# Altium PCB PDB_Rev2.PcbDoc (part 2 of 2)
Units mil, origin at the board's own origin, x right, y up, seen from the top; angles counter-clockwise.
Board outline 2952.76 x 3937.01 mil, 2 copper layers (Top Layer, Bottom Layer); 43 components, 21 nets, 155 pads, 33 vias.
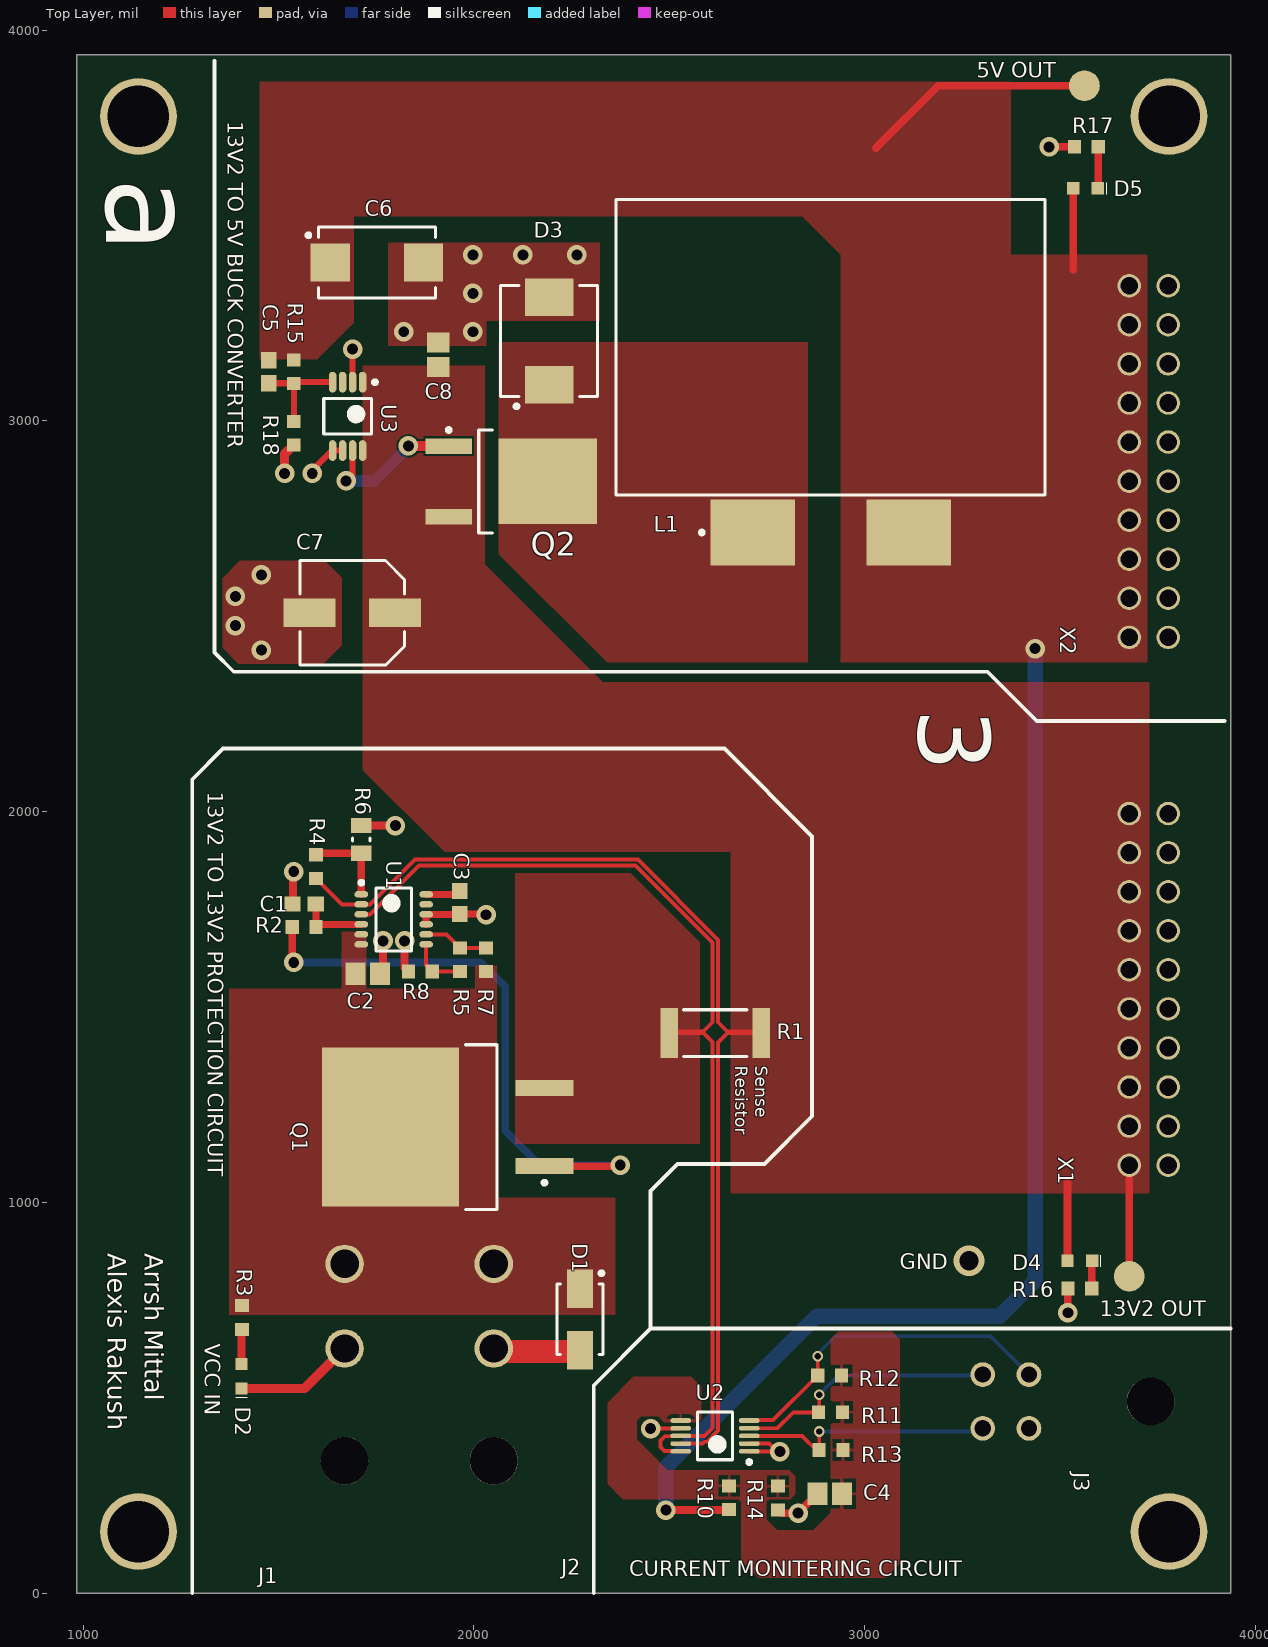
[diagram p0: Top Layer view]

## Part data (continued)
R13: library part 0603-10KR, "RES SMD 10K OHM 5% 1/10W 0603", Case/Package=0603, Case Code (Metric)=1608, Manufacturer=Yageo, Manufacturer Part Number=RC0603JR-0710KL, Max Operating Temperature=155°C, Max Power Dissipation=100mW, Min Operating Temperature=-55°C, Resistance=10kR, Supplier Part Number 1=311-10KGRDKR-ND, Temperature Coefficient=100ppm/°C, Tolerance=5%, Voltage Rating=50V, Case Code (Imperial)=0603, ComponentLink1Description=http://www.yageo.com/documents/recent/PYu-RC_Group_51_RoHS_L_10.pdf?src-supplier=Digi-Key, ComponentLink1URL=http://www.yageo.com/documents/recent/PYu-RC_Group_51_RoHS_L_10.pdf?src-supplier=Digi-Key, Composition="Thick Film", Contact Plating=Tin,Matte, Depth=0.8mm, Features="Moisture Resistant", Height - Seated (Max)=0.022inch, Lead Free="Lead Free", Length=0.063inch, Military Standard=Not, Number of Pins=2, Number of Terminations=2, Packaging="Tape and Reel", Power Rating=100mW, Pricing 1="1=0.1, 10=0.019, 100=0.0077, 1000=0.00347, 2500=0.00301 (USD)", Radiation Hardening=No, REACH SVHC=Unknown, Stock 1=3006558, Supplier 1=Digi-Key, Termination=SMD/SMT, Voltage Rating (DC)=50V, Width=0.031inch
R14: library part 0603-6.65KR, "RES SMD 6.65K OHM 0.1% 1/6W 0603", Case/Package=0603, Case Code (Metric)=1608, Manufacturer="TE Connectivity", Manufacturer Part Number=8-2176088-4, Max Operating Temperature=155°C, Max Power Dissipation=167mW, Min Operating Temperature=-55°C, Package Quantity=1000, Power Rating=166mW, Resistance=6.65kR, Resistor Type="Thin Film", Supplier Part Number 1=A110187DKR-ND, Temperature Coefficient=25ppm/°C, Tolerance=0.1%, Voltage Rating=100V, Case Code (Imperial)=0603, ComponentLink1Description=http://www.te.com/commerce/DocumentDelivery/DDEController?Action=srchrtrv&DocNm=1773272&DocType=DS&DocLang=English&src-supplier=Digi-Key, ComponentLink1URL=http://www.te.com/commerce/DocumentDelivery/DDEController?Action=srchrtrv&DocNm=1773272&DocType=DS&DocLang=English&src-supplier=Digi-Key, Height=0.022inch, Length=0.061inch, Mount="Surface Mount", Number of Terminations=2, Packaging="Tape and Reel", Pricing 1="1=0.69, 10=0.494, 100=0.2568 (USD)", Stock 1=400, Supplier 1=Digi-Key, Termination=Solder, Width=0.031inch
R15: library part 0603-24KR, "Res Thick Film 0603 24K Ohm 1% 0.1W(1/10W) ±100ppm/C Molded SMD Automotive Paper T/R", Case/Package=0603, Case Code (Metric)=1608, Manufacturer=Vishay, Manufacturer Part Number=CRCW060324K0FKEA, Max Operating Temperature=155°C, Max Power Dissipation=100mW, Min Operating Temperature=-55°C, Package Quantity=10, Resistance=24kR, Resistance Tolerance=1%, Resistor Type="Thick Film", Supplier Part Number 1=541-24.0KHCT-ND, Temperature Coefficient=100ppm/°C, Voltage Rating=75V, Case Code (Imperial)=0603, ComponentLink1Description=https://www.distrelec.biz/Web/Downloads/a_/en/flD-CRCW-e3_data_en.pdf?mime=application%2Fpdf&src-supplier=Distrelec, ComponentLink1URL=https://www.distrelec.biz/Web/Downloads/a_/en/flD-CRCW-e3_data_en.pdf?mime=application%2Fpdf&src-supplier=Distrelec, ComponentLink2Description=http://www.farnell.com/datasheets/2045673.pdf?src-supplier=Element14, ComponentLink2URL=http://www.farnell.com/datasheets/2045673.pdf?src-supplier=Element14, ComponentLink3Description=http://www.vishay.com/docs/20035/dcrcwe3.pdf?src-supplier=Digi-Key, ComponentLink3URL=http://www.vishay.com/docs/20035/dcrcwe3.pdf?src-supplier=Digi-Key, ComponentLink4Description=http://uk.rs-online.com/webdocs/0d98/0900766b80d98afc.pdf?src-supplier=RSComponents, ComponentLink4URL=http://uk.rs-online.com/webdocs/0d98/0900766b80d98afc.pdf?src-supplier=RSComponents, ComponentLink5Description=https://www.alliedelec.com/m/d/0c934d6939ccefa68dbe0b96d821c8cf.pdf?src-supplier=Allied+Electronics, ComponentLink5URL=https://www.alliedelec.com/m/d/0c934d6939ccefa68dbe0b96d821c8cf.pdf?src-supplier=Allied+Electronics, ComponentLink6Description=http://www.mouser.com/ds/2/427/dcrcwe3-109170.pdf?src-supplier=Mouser, ComponentLink6URL=http://www.mouser.com/ds/2/427/dcrcwe3-109170.pdf?src-supplier=Mouser, ComponentLink7Description=http://www.vishay.com/docs/20035/dcrcwe3.pdf?src-supplier=Future+Electronics, ComponentLink7URL=http://www.vishay.com/docs/20035/dcrcwe3.pdf?src-supplier=Future+Electronics, ComponentLink8Description=http://www.vishay.com/docs/20035/dcrcwe3.pdf?src-supplier=Avnet+Europe, ComponentLink8URL=http://www.vishay.com/docs/20035/dcrcwe3.pdf?src-supplier=Avnet+Europe, ComponentLink9Description=http://www.vishay.com/docs/20035/dcrcwe3.pdf?src-supplier=Avnet, ComponentLink9URL=http://www.vishay.com/docs/20035/dcrcwe3.pdf?src-supplier=Avnet, Construction=Rectangular, Contact Plating=Tin, Depth=0.85mm, Features="Automotive AEC-Q200", Height=0.45mm, Lead Free="Lead Free", Length=1.55mm, Military Standard=Not, Mount="Surface Mount", Number of Terminations=2, Packaging="Tape and Reel", Power Rating=100mW, Pricing 1="1=0.1, 10=0.036, 100=0.0145, 1000=0.00652, 2500=0.00566 (USD)", Radiation Hardening=No, REACH SVHC=Unknown, RoHS Compliant=Yes, Series=CRCW, Stock 1=989, Supplier 1=Digi-Key, Technology="THICK FILM", Termination=SMD/SMT, Tolerance=1%, Voltage Rating (DC)=75V, Weight=7.1E-05oz, Width=0.033inch, Working Voltage=75V
R16: library part 0603-665R, "RES SMD 665 OHM 1% 1/10W 0603", Case/Package=0603, Case Code (Metric)=1608, Manufacturer=Yageo, Manufacturer Part Number=RC0603FR-07665RL, Max Operating Temperature=155°C, Max Power Dissipation=100mW, Min Operating Temperature=-55°C, Package Quantity=1, Supplier Part Number 1=311-665HRDKR-ND, Temperature Coefficient=100ppm/°C, Tolerance=1%, Voltage Rating=75V, Voltage Rating (DC)=50V, Case Code (Imperial)=0603, ComponentLink1Description=http://www.yageo.com/documents/recent/PYu-RC_Group_51_RoHS_L_9.pdf?src-supplier=Digi-Key, ComponentLink1URL=http://www.yageo.com/documents/recent/PYu-RC_Group_51_RoHS_L_9.pdf?src-supplier=Digi-Key, ComponentLink2Description=http://www.yageo.com/documents/recent/PYu-RC0603_51_RoHS_L_4.pdf?src-supplier=Avnet, ComponentLink2URL=http://www.yageo.com/documents/recent/PYu-RC0603_51_RoHS_L_4.pdf?src-supplier=Avnet, ComponentLink3Description=http://www.yageo.com/documents/recent/PYu-RC_Group_51_RoHS_L_10.pdf?src-supplier=Digi-Key, ComponentLink3URL=http://www.yageo.com/documents/recent/PYu-RC_Group_51_RoHS_L_10.pdf?src-supplier=Digi-Key, ComponentLink4Description=http://www.yageo.com/documents/recent/PYu-RC0603_51_RoHS_L_4.pdf?src-supplier=Avnet+Europe, ComponentLink4URL=http://www.yageo.com/documents/recent/PYu-RC0603_51_RoHS_L_4.pdf?src-supplier=Avnet+Europe, Composition="Thick Film", Contact Plating=Tin,Matte, Depth=0.8mm, Features="Moisture Resistant", Height=0.022inch, Lead Free="Lead Free", Length=1.6mm, Military Standard=Not, Number of Terminations=2, Packaging="Tape and Reel", Power Rating=100mW, Pricing 1="1=0.1, 10=0.023, 100=0.0094, 1000=0.00421, 2500=0.00366 (USD)", Resistance=665R, Stock 1=143871, Supplier 1=Digi-Key, Termination=SMD/SMT, Weight=7.1E-05oz, Width=0.8mm
R17: library part 0603-180R, "RES SMD 180 OHM 1% 1/10W 0603", Case/Package=0603, Case Code (Metric)=1608, Manufacturer="TE Connectivity", Manufacturer Part Number=CRGCQ0603F180R, Max Operating Temperature=155°C, Max Power Dissipation=100mW, Min Operating Temperature=-55°C, Supplier Part Number 1=A129679DKR-ND, Temperature Coefficient=100ppm/°C, Tolerance=1%, Case Code (Imperial)=0603, ComponentLink1Description=https://www.te.com/commerce/DocumentDelivery/DDEController?Action=srchrtrv&DocNm=1773204-3&DocType=DS&DocLang=English&src-supplier=Digi-Key, ComponentLink1URL=https://www.te.com/commerce/DocumentDelivery/DDEController?Action=srchrtrv&DocNm=1773204-3&DocType=DS&DocLang=English&src-supplier=Digi-Key, ComponentLink2Description=https://www.te.com/commerce/DocumentDelivery/DDEController?Action=srchrtrv&amp;DocNm=1773204-3&amp;DocType=DS&amp;DocLang=English&src-supplier=Digi-Key, ComponentLink2URL=https://www.te.com/commerce/DocumentDelivery/DDEController?Action=srchrtrv&amp;DocNm=1773204-3&amp;DocType=DS&amp;DocLang=English&src-supplier=Digi-Key, ComponentLink3Description=http://www.te.com/commerce/DocumentDelivery/DDEController?Action=srchrtrv&DocNm=1773204-3&DocType=DS&DocLang=English&src-supplier=Digi-Key, ComponentLink3URL=http://www.te.com/commerce/DocumentDelivery/DDEController?Action=srchrtrv&DocNm=1773204-3&DocType=DS&DocLang=English&src-supplier=Digi-Key, ComponentLink4Description=http://www.farnell.com/datasheets/2609223.pdf?src-supplier=Farnell, ComponentLink4URL=http://www.farnell.com/datasheets/2609223.pdf?src-supplier=Farnell, Composition="Thick Film", Features="Moisture Resistant,Automotive AEC-Q200", Number of Terminations=2, Packaging="Tape and Reel", Pricing 1="1=0.1, 10=0.03, 100=0.012, 1000=0.00541, 2500=0.00469 (USD)", Resistance=180R, Stock 1=17329, Supplier 1=Digi-Key
R18: library part 0603-7.87KR, "RES SMD 7.87K OHM 1% 1/10W 0603", Case/Package=0603, Case Code (Metric)=1608, Manufacturer=Vishay, Manufacturer Part Number=CRCW06037K87FKEA, Max Operating Temperature=155°C, Max Power Dissipation=100mW, Min Operating Temperature=-55°C, Package Quantity=10, Resistance=7.87kR, Resistance Tolerance=1%, Resistor Type="Thick Film", Supplier Part Number 1=541-7.87KHCT-ND, Temperature Coefficient=100ppm/°C, Voltage Rating=75V, Case Code (Imperial)=0603, ComponentLink1Description=http://www.farnell.com/datasheets/2111203.pdf?src-supplier=Element14, ComponentLink1URL=http://www.farnell.com/datasheets/2111203.pdf?src-supplier=Element14, ComponentLink2Description=http://www.farnell.com/datasheets/2046716.pdf?src-supplier=Element14, ComponentLink2URL=http://www.farnell.com/datasheets/2046716.pdf?src-supplier=Element14, ComponentLink3Description=http://www.vishay.com/docs/20035/dcrcwe3.pdf?src-supplier=Digi-Key, ComponentLink3URL=http://www.vishay.com/docs/20035/dcrcwe3.pdf?src-supplier=Digi-Key, ComponentLink4Description=http://uk.rs-online.com/webdocs/0d98/0900766b80d98afc.pdf?src-supplier=RSComponents, ComponentLink4URL=http://uk.rs-online.com/webdocs/0d98/0900766b80d98afc.pdf?src-supplier=RSComponents, ComponentLink5Description=https://www.alliedelec.com/m/d/0c934d6939ccefa68dbe0b96d821c8cf.pdf?src-supplier=Allied+Electronics, ComponentLink5URL=https://www.alliedelec.com/m/d/0c934d6939ccefa68dbe0b96d821c8cf.pdf?src-supplier=Allied+Electronics, ComponentLink6Description=http://www.mouser.com/ds/2/427/dcrcwe3-109170.pdf?src-supplier=Mouser, ComponentLink6URL=http://www.mouser.com/ds/2/427/dcrcwe3-109170.pdf?src-supplier=Mouser, ComponentLink7Description=http://www.vishay.com/docs/20035/dcrcwe3.pdf?src-supplier=Future+Electronics, ComponentLink7URL=http://www.vishay.com/docs/20035/dcrcwe3.pdf?src-supplier=Future+Electronics, ComponentLink8Description=http://www.vishay.com/docs/20035/dcrcwe3.pdf?src-supplier=Avnet+Europe, ComponentLink8URL=http://www.vishay.com/docs/20035/dcrcwe3.pdf?src-supplier=Avnet+Europe, ComponentLink9Description=http://www.vishay.com/docs/20035/dcrcwe3.pdf?src-supplier=Avnet, ComponentLink9URL=http://www.vishay.com/docs/20035/dcrcwe3.pdf?src-supplier=Avnet, Construction=Rectangular, Contact Plating=Tin, Depth=0.85mm, Features="Automotive AEC-Q200", Height=0.45mm, Length=1.55mm, Military Standard=Not, Number of Pins=2, Number of Terminations=2, Packaging="Tape and Reel", Power Rating=100mW, Pricing 1="1=0.1, 10=0.036, 100=0.0145, 1000=0.00652, 2500=0.00566 (USD)", Radiation Hardening=No, REACH SVHC=Unknown, RoHS Compliant=Yes, Series=CRCW, Size Code=0603, Stock 1=4858, Supplier 1=Digi-Key, Technology="THICK FILM", Termination=SMD/SMT, Tolerance=1%, Weight=7.1E-05oz, Width=0.85mm
U1: "IC SURGE STOPPER HV 12-MSOP", Case/Package=TSSOP, Clamping Voltage=27V, Manufacturer="Analog Devices / Linear Technology", Package Quantity=2500, Supplier Part Number 1=LT4363IMS-2#TRPBFDKR-ND, Working Voltage=80V, ComponentLink1Description=http://www.linear.com/docs/40854?src-supplier=Digi-Key, ComponentLink1URL=http://www.linear.com/docs/40854?src-supplier=Digi-Key, Lead Free="Lead Free", Manufacturer Part Number=LT4363IMS-2#TRPBF, Number of Circuits=1, Number of Pins=12, Packaging="Tape and Reel", Pricing 1="1=6.96, 10=6.29, 25=5.9976, 100=4.9735, 250=4.53468, 500=4.24212, 1000=3.864 (USD)", RoHS Compliant=Yes, Stock 1=0, Supplier 1=Digi-Key
U2: "Bi Directional Current and Power Monitor 10-Pin VSSOP T/R", Case/Package=VSSOP, Input Bias Current=10uA, Input Offset Voltage (Vos)=2.5uV, Manufacturer="Texas Instruments", Max Operating Temperature=125°C, Max Supply Voltage=5.5V, Min Operating Temperature=-40°C, Min Supply Voltage=2.7V, Nominal Supply Current=330uA, Output Current=10mA, Package Quantity=1, Supplier Part Number 1=296-29034-1-ND, Accuracy=0.02%, Bandwidth=3.5kHz, Common Mode Rejection Ratio=140dB, ComponentLink1Description=http://www.farnell.com/datasheets/1840205.pdf?src-supplier=Element14, ComponentLink1URL=http://www.farnell.com/datasheets/1840205.pdf?src-supplier=Element14, ComponentLink2Description=http://www.ti.com/lit/ds/symlink/ina226.pdf?src-supplier=Digi-Key, ComponentLink2URL=http://www.ti.com/lit/ds/symlink/ina226.pdf?src-supplier=Digi-Key, ComponentLink3Description=http://www.ti.com/lit/gpn/ina226?src-supplier=Mouser, ComponentLink3URL=http://www.ti.com/lit/gpn/ina226?src-supplier=Mouser, ComponentLink4Description=http://www.ti.com/general/docs/lit/getliterature.tsp?genericPartNumber=INA226&&fileType=pdf&src-supplier=Avnet, ComponentLink4URL=http://www.ti.com/general/docs/lit/getliterature.tsp?genericPartNumber=INA226&&fileType=pdf&src-supplier=Avnet, Contact Plating=Gold, Lead Free="Lead Free", Manufacturer Part Number=INA226AIDGSR, Mount="Surface Mount", Number of Amplifiers=1, Number of Pins=10, Packaging="Tape and Reel", Pricing 1="1=3.37, 10=3.027, 25=2.862, 100=2.3532, 250=2.11152, 500=2.0352, 1000=1.69176 (USD)", Radiation Hardening=No, REACH SVHC="No SVHC", RoHS Compliant=Yes, Series=-, Stock 1=55797, Supplier 1=Digi-Key, Supply Current=330uA
U3: "DC DC Cntrlr Single-OUT Buck 4.5V to 35V Input 8-Pin VSSOP T/R", Case/Package=VSSOP, Manufacturer="TI National Semiconductor", Max Frequency=1MHz, Max Operating Temperature=125°C, Min Operating Temperature=-40°C, Operating Supply Voltage=35V, Output Current=4A, Quiescent Current=280uA, Supplier Part Number 1=296-35277-6-ND, Switching Frequency=1.4MHz, ComponentLink1Description=http://www.ti.com/lit/ds/symlink/lm3489.pdf?src-supplier=Digi-Key, ComponentLink1URL=http://www.ti.com/lit/ds/symlink/lm3489.pdf?src-supplier=Digi-Key, Contact Plating=Tin, Duty Cycle=100%, Lead Free="Lead Free", Manufacturer Part Number=LM3489MMX/NOPB, Max Duty Cycle=100%, Mount="Surface Mount", Number of Channels=1, Number of Outputs=1, Number of Pins=8, Output Voltage=35V, Packaging="Tape and Reel", Pricing 1="1=1.66, 10=1.485, 25=1.4096, 100=1.0825, 250=0.95664, 500=0.9063, 1000=0.7049 (USD)", Radiation Hardening=No, RoHS Compliant=Yes, Stock 1=11594, Supplier 1=Digi-Key
X1 X2: library part RECT_MOLEX_20pin, "Connector Header Through Hole 20 position 0.100\" (2.54mm)", ComponentLink1Description=https://www.digikey.ca/en/products/detail/0702462001/WM6548-ND/760170?utm_campaign=buynow&utm_medium=aggregator&curr=cad&utm_source=octopart, ComponentLink1URL=https://www.digikey.ca/en/products/detail/0702462001/WM6548-ND/760170?utm_campaign=buynow&utm_medium=aggregator&curr=cad&utm_source=octopart, Supplier 1=Digi-Key, Supplier Part Number 1=WM6548-ND

## Free pads (board coordinates)
  round 196.85 hole 157.48: 2(1141.73,157.48) 2(1141.73,3779.53) 2(3779.53,157.48) 2(3779.53,3779.53)

## Via types
v1: diameter 50, hole 28, Top Layer to Bottom Layer, 29 vias
v2: diameter 27.56, hole 15.75, Top Layer to Bottom Layer, 3 vias
v3: diameter 78.74, hole 49.21, Top Layer to Bottom Layer, 1 vias

## Nets (pads, with @x,y where several pads share a name; then routed paths per layer and width w, separated by ;. In a path a pad name is that pad's centre, name@x,y a point inside that pad or via, vN(x,y) a via of type N, cw(c..) or ccw(c..) an arc to the next point about the centre after c; other vN are vias at no path point)
3V2: C4.2 R10.1 R11.2 R12.2 R13.2 R14.1 U2.6 | length 8.6
  Top Layer w6: R14.1@2776.36,271.65 R14.1 ; R12.2@2937.49,553.31 R12.2
5V_OUT: C5.2 C6.1 D5.1 JP2.1 L1.2 R10.2 R15.2 X2.1 X2.2 X2.3 X2.4 X2.5 X2.6 X2.7 X2.8 X2.9 X2.10 | length 3842.1
  Top Layer w6: R10.2@2652.72,212.76 R10.2
  Top Layer w19.68: v1(2491.52,212.6) 2652.56,212.6 R10.2@2652.72,212.76 ; 3029.53,3698.82 3188.98,3858.27 JP2.1 ; 3534.45,3386.81 D5.1 ; X2.10@3677.17,3346.54 X2.10
  Bottom Layer w39.37: v1(2491.52,212.6) 2491.52,322.23 2877.95,708.66 3346.46,708.66 3437.01,799.21 3437.01,2244.09 v1(3437.01,2417.32)
13V_N: Q1.3 R1.1 U1.3 U2.8 U2.10 | length 2683.9
  Top Layer w10: U1.3 1734.82,1737.2 1859.82,1862.2 2413.76,1862.2 2610.61,1665.35 2610.61,1461 2587.68,1438.07 2505,1438.07 R1.1 2587.6,1433.07 2610.61,1410.06 2610.61,422.32 2590.61,402.32 U2.8 2528.91,401.42 2489.48,401.42 2478.35,390.28 2478.35,374.02 2488.5,363.86 2528.91,363.86 U2.10
13V_P: C7.1 C8.2 D4.1 JP1.1 Q2.3 R1.2 R4.2 U1.2 U2.9 U3.1 U3.8 X1.1 X1.2 X1.3 X1.4 X1.5 X1.6 X1.7 X1.8 X1.9 X1.10 | length 3230
  Top Layer w10: R4.2 1662.4,1762.8 U1.2 1734.82,1762.8 1849.23,1877.2 2419.97,1877.2 2625.61,1671.57 2625.61,1461 2648.54,1438.07 2731.22,1438.07 R1.2 2649.61,1433.07 2625.61,1409.07 2625.61,416.11 2596.82,387.32 2590.61,387.32 2585.93,382.64 U2.9
  Top Layer w19.68: D4.1 3519.68,1051.18 ; JP1.1 X1.1
ALERT_OUT: J3.4 R13.1 U2.3 | length 658.1
  Top Layer w10: U2.3 2839.99,402.32 R13.1@2877.98,364.33 ; R13.1 v2(2884.18,413.39)
  Bottom Layer w10: v2(2884.18,413.39) 3294.71,413.39 J3.4
FB: C5.1 R15.1 R18.2 U3.4 | length 263.2
  Top Layer w15.75: C5.1@1480.32,3096.46 1541.34,3096.46 R15.1@1543.31,3098.43 ; R18.2@1543.31,2996.06 1543.31,2999.02 1540.35,3001.97 1540.35,3091.54 R15.1@1543.31,3094.49 ; R15.1@1543.31,3095.47 R15.1@1543.31,3094.49 ; U3.4 1548.23,3099.41 R15.1@1543.31,3094.49
FB_1: R4.1 R6.2 U1.1 | length 222.4
  Top Layer w19.68: R4.1 1600.39,1893.7 R6.2 U1.1@1712.32,1788.78
FET_GATE: Q1.1 R2.2 | length 1544.6
  Top Layer w19.68: R2.2@1535.43,1695.87 1535.43,1618.11 v1(1539.37,1614.17) ; Q1.1 2372.64,1092.91 v1(2375,1095.28)
  Bottom Layer w19.68: v1(1539.37,1614.17) 2018.13,1614.17 2080.71,1551.6 2080.71,1183.07 2168.5,1095.28 v1(2375,1095.28)
GND: C1.1 C2.1 C3.1 C4.1 C6.2 C7.2 C8.1 D1.2 D2.2 D3.2 J1.2 J2.2 J3.1 R6.1 R8.1 R14.2 R16.1 R17.1 R18.1 U1.9 U1.10 U2.1 U2.2 U2.7 U3.2 U3.5 U3.6 X1.11 X1.12 X1.13 X1.14 X1.15 X1.16 X1.17 X1.18 X1.19 X1.20 X2.11 X2.12 X2.13 X2.14 X2.15 X2.16 X2.17 X2.18 X2.19 X2.20 | length 1820.5
  Top Layer w6: U2.7@2528.44,421.26 2529.5,422.32 U2.7 ; v1@2775.59,362.95 2776.34,362.2 v1(2783.46,362.2) ; R14.2 R14.2@2786.51,204.72 ; v1@2826.77,204.72 v1(2830.05,204.72) v1@2834.65,209.32
  Top Layer w10: v1(2452.76,421.26) U2.7@2528.44,421.26 ; U2.1 2775.59,362.95 2755.91,382.64 U2.2
  Top Layer w15.75: v1(1586.61,2866.14) 1586.61,2874.02 1637.8,2925.2 U3.5 U3.6 ; U3.2@1689.96,3095.47 U3.2 v1(1689.96,3184.06)
  Top Layer w17.72: U1.9 U1.10 C3.1@1963.58,1737.2 ; C3.1 2029.57,1738.19 v1(2031.54,1736.22)
  Top Layer w19.68: C1.1@1537.4,1763.78 1537.4,1844.49 v1(1539.37,1846.46) ; R6.1 v1(1799.21,1964.57) ; C2.1 1767.72,1593.5 v1(1767.72,1669.29) ; v1(1822.83,1669.29) 1822.83,1600.39 R8.1 ; C3.1@1963.58,1737.2 C3.1 ; R14.2@2786.51,204.72 v1@2826.77,204.72 ; v1@2834.65,209.32 C4.1 ; v1(3472.44,3701.77) 3535.43,3701.77 3536.42,3700.79 R17.1 ; v1(3520.67,717.52) R16.1
  Top Layer w23.62: D2.2 1566.85,523.62 J1.2 ; v1(1515.75,2866.14) 1515.75,2915.35 1537.4,2937.01 R18.1@1544.29,2937.01
  Top Layer w59.06: J2.2 2059.13,618.11 D1.2@2271.65,618.11
  other v1: 1456.69,2413.39 1389.76,2476.38 1389.76,2551.18 1456.69,2606.3 1820.87,3228.35 1998.03,3228.35 1998.03,3326.77 1998.03,3425.2 2125.98,3425.2 2263.78,3425.2
  other v3: 3267.72,850.39
IC_GATE: C1.2 R2.1 U1.4 | length 180.8
  Top Layer w17.72: R2.1@1596.46,1695.87 C1.2@1596.46,1763.78 ; R2.1@1599.41,1711.61 U1.4
NetD2_1: D2.1 R3.1 | length 83.7
  Top Layer w19.68: D2.1 R3.1@1405.51,670.28
NetD3_1: D3.1 L1.1 Q2.2
NetD4_2: D4.2 R16.2 | length 52.6
  Top Layer w19.68: D4.2@3581.69,850.39 3581.69,799.21 3582.68,798.23
NetD5_2: D5.2 R17.2 | length 106.7
  Top Layer w19.68: D5.2 3598.43,3596.46 R17.2
NetQ2_1: Q2.1 U3.7 | length 396.4
  Top Layer w15.75: v1(1673.23,2846.46) 1689.96,2863.19 U3.7
  Top Layer w25: v1(1832.68,2936.02) 1943.9,2936.02 Q2.1@1944.88,2937.01
  Bottom Layer w30: v1(1673.23,2846.46) 1746.06,2846.46 1833.66,2934.06 1832.68,2935.04 v1(1832.68,2936.02)
NetR5_1: R5.1 R7.2 U1.8 | length 167.5
  Top Layer w10: U1.8 1930.12,1686.02 R5.1 R7.2
NetR5_2: R5.2 R8.2 U1.7 | length 147.2
  Top Layer w10: U1.7 1878.23,1606.02 R8.2 R5.2
SCL_OUT: J3.2 R12.1 U2.5 | length 878
  Top Layer w10: U2.5@2705.01,442.91 2766.07,442.91 R12.1 v2(2880.4,606.3)
  Bottom Layer w10: v2(2880.4,606.3) 2880.4,612.69 2925.2,657.48 3322.9,657.48 J3.2
SDA_OUT: J3.3 R11.1 U2.4 | length 673.9
  Top Layer w10: U2.4 2777.06,422.01 ; 2777.06,422.32 2777.37,422.32 2817.8,462.76 R11.1@2876.47,462.76 ; R11.1 2884.18,464.06 v2(2884.18,507.87)
  Bottom Layer w10: v2(2884.18,507.87) 2933.4,557.09 3300.62,557.09 J3.3
TMR: C3.2 U1.12 | length 90
  Top Layer w17.72: U1.12 C3.2@1955.71,1788.39
  Top Layer w19.68: C3.2@1955.71,1788.39 C3.2
Vcc: C2.2 D1.1 J1.1 J2.1 Q1.4 R3.2 R7.1 U1.5 U1.6
pads on no net: J1.3 J2.3 J3.5 U1.11 U3.3

## Polygon pours and split planes (outlines as drawn)
13V_P on Top Layer "Top Layer-13V_P 1" (solid, pour order 32): 2027.56,3141.73 2027.56,2633.86 2329.72,2331.69 3728.35,2331.69 3728.35,1897.64 1925.2,1897.64 1716.53,2106.3 1716.54,3141.73
5V_OUT on Top Layer "Top Layer-5V_OUT 1" (solid, pour order 134): 1452.76,3157.48 1599.41,3157.48 1692.91,3250.98 1692.91,3523.62 2840.58,3523.62 2978.37,3385.83 3374.02,3385.83 3374.02,3868.11 1452.76,3868.11
Vcc on Top Layer "Top Layer-Vcc" (solid, pour order 130): 1724.41,1535.43 1724.41,1692.91 1662.4,1692.91 1662.4,1535.43
Vcc on Top Layer "Top Layer-Vcc 1" (solid, pour order 128): 2059.05,1547.24 2059.13,1547.32 2059.13,1606.3 2003.94,1606.3 2003.94,1547.24
Vcc on Top Layer "Top Layer-Vcc 2" (solid, pour order 126): 2059.06,712.6 2362.2,712.6 2362.2,1011.81 2059.06,1011.81 2059.06,712.6
GND on Top Layer "Top Layer-GND" (solid, pour order 124): 1619.09,2641.73 1662.4,2598.43 1662.4,2426.18 1615.16,2378.94 1397.64,2378.94 1357.28,2419.29 1357.28,2597.44 1401.57,2641.73 1437.99,2641.73
GND on Top Layer "Top Layer-GND 1" (solid, pour order 116): 1781.5,3192.91 2032.48,3192.91 2032.48,3256.89 2322.59,3256.89 2322.59,3456.71 1781.5,3456.71
3V2 on Top Layer "Top Layer-3V2 1" (solid, pour order 36): 2913.39,649.61 2933.07,669.29 3070.87,669.29 3090.55,649.61 3090.55,216.54 3070.87,196.85 2913.39,196.85
no net on Top Layer "Top Layer-No Net 9" (solid, pour order 86): 1311.02,1566.93
no net on Top Layer "Top Layer-No Net 1" (solid, pour order 72): 2559.06,1287.4
13V_N on Top Layer "Top Layer-13V_N 1" (solid, pour order 70): 2578.74,1149.61 2578.74,1665.36 2401.57,1842.52 2106.3,1842.52 2106.3,1149.61
5V_OUT on Top Layer "Top Layer-5V_OUT" (solid, pour order 30): 3724.41,2381.89 2939.01,2381.89 2939,3425.2 3724.41,3425.2
13V_P on Top Layer "Top Layer-IN_N" (solid, pour order 28): 3728.35,1023.62 2657.48,1023.62 2657.48,1929.13 2803.15,2074.8 3677.17,2074.8 3728.35,2023.62
no net on Top Layer "Top Layer-No Net 6" (solid, pour order 64): 3358.27,3685.04
no net on Top Layer "Top Layer-No Net 7" (solid, pour order 52): 2460.63,507.87
3V2 on Top Layer "Top Layer-3V2" (solid, pour order 50): 2484.25,440.94 2492.13,433.07 2570.87,433.07 2582.68,444.88 2582.68,527.56 2556.99,553.24 2408.12,553.24 2342.52,487.64 2342.52,279.53 2381.89,240.16 2551.18,240.16 2622.05,240.16 2625.83,243.94 2625.83,314.8 2496.12,314.9 2417.32,393.7 2417.32,440.94 2429.13,452.76 2472.44,452.76
3V2 on Top Layer "Top Layer-3V2 2" (solid, pour order 44): 2610.24,251.97 2610.24,299.21 2625.98,314.96 2807.09,314.96 2822.83,299.21 2822.83,253.06 2809.93,240.16 2755.91,240.16 2749.04,233.29 2749.04,188.73 2776.36,161.42 2870.08,161.42 2870.08,162.02 2918.99,210.93 3065.26,210.93 3090.55,255.91 3090.55,199.31 3090.55,74.8 3055.12,39.37 2728.35,39.37 2685.04,82.68 2685.04,232.28 2677.17,240.16 2622.05,240.16
no net on Top Layer "Top Layer-No Net 8" (solid, pour order 38): 3118.11,696.85
NetD3_1 on Top Layer "Top Layer-NetD3_1" (solid, pour order 34): 2854.33,2381.89 2854.33,3201.77 2063.98,3201.77 2063.98,2659.45 2341.54,2381.89
no net on Top Layer "Top Layer-No Net" (solid, pour order 24): 2440.94,1633.86
no net on Top Layer "Top Layer-No Net 2" (solid, pour order 16): 2161.64,1314.96
Vcc on Top Layer "Top Layer-No Net 3" (solid, pour order 8): 1374.02,1547.24 2059.05,1547.24 2059.05,1110.24 2059.06,712.6 1374.02,712.6
no net on Top Layer "Top Layer-No Net 4" (solid, pour order 12): 1322.83,1078.74
no net on Top Layer "Top Layer-No Net 5" (solid, pour order 10): 1322.83,1078.74
GND on Bottom Layer "Bottom Layer-GND" (solid, pour order 104): 984.25,3937.01 3937.01,3937.01 3937.01,0 984.25,0
no net on Bottom Layer "Bottom Layer-No Net" (solid, pour order 102): 1023.62,3897.64
13V_N on Top Solder "Top Layer-13V_N 1" (solid, pour order 106): 2578.74,1149.61 2578.74,1665.35 2401.58,1842.52 2106.3,1842.52 2106.3,1149.61

## Silkscreen, mask and mechanical layers (free items; w line width, h text height)
Top Overlay:
  lines w10: 1279.53,0 1279.53,2082.68 1358.27,2161.42 2641.73,2161.42 2866.14,1937.01 2866.14,1220.47 2744.09,1098.43 2521.56,1098.43 2452.76,1029.62 2452.76,677.17 ; 1336.61,3921.26 1336.61,2407.48 1385.83,2358.27 3314.96,2358.27 3440.94,2232.28 3921.26,2232.28 ; 2307.09,0 2307.09,531.5 2452.76,677.17 ; 3937.01,677.17 2452.76,677.17
  text "5V OUT" at 3287.4,3877.95 h39.37
  text "13V2 TO 5V BUCK CONVERTER" at 1370.08,3767.72 h39.37 r270
  text "a" at 984.25,3622.05 h393.7 r270
  text "3" at 3078.74,2263.78 h314.96 r270
  text "13V2 TO 13V2 PROTECTION CIRCUIT" at 1318.9,2051.18 h39.37 r270
  text "Resistor" at 2669.29,1350.39 h32 r270
  text "Sense" at 2720.47,1350.39 h32 r270
  text "Alexis Rakush" at 1062.99,869.94 h47.24 r270
  text "Arrsh Mittal" at 1157.96,869.94 h47.24 r270
  text "GND" at 3090.55,828.45 h39.37
  text "13V2 OUT" at 3602.36,708.66 h39.37
  text "VCC IN" at 1311.02,637.8 h39.37 r270
  text "CURRENT MONITERING CIRCUIT" at 2397.64,43.31 h39.37
Bottom Overlay:
  text "GND" at 3822.83,2847.44 h39.37 r270
  text "5V OUTPUT" at 3594.49,2720.47 h39.37 r270
  text "1" at 2527.56,2649.61 h984.25 r270
  text "Rev2-B" at 1062.99,2082.68 h60 r270
  text "Power Distribution Board" at 1188.98,2082.68 h60 r270
  text "GND" at 3822.83,1492.13 h39.37 r270
  text "13V2 OUTPUT" at 3594.49,1334.65 h39.37 r270
  text "z" at 2834.65,1055.12 h275.59 r270
  text "VCC INPUT / (FROM BATTERY)" at 2118.11,921.26 h39.37
  text "GND" at 1921.26,598.97 h39.37
  text "SDA_OUT" at 3228.35,546.89 h27.56
  text "SCL_OUT" at 3658.66,546.89 h27.56
  text "ALERT_OUT" at 3228.35,403.17 h27.56
  text "GND" at 3553.23,402.32 h27.56
Board outline:
  the board outline again, w10